# EAGLE board indicator_lights (EAGLE 7.2.0)
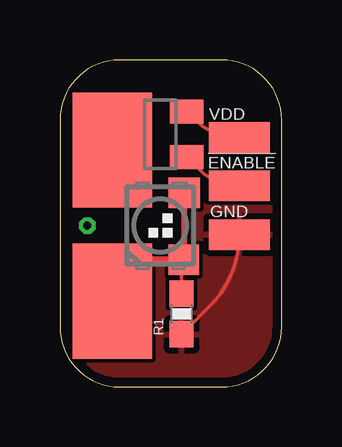
[diagram p0: board, top side]
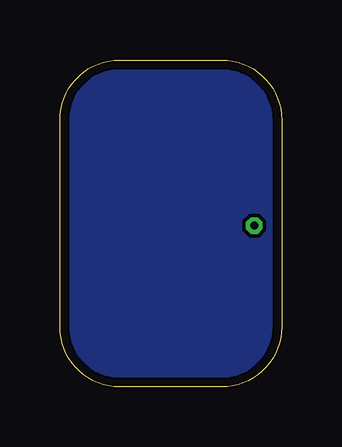
[diagram p1: board, bottom side, seen from below]

Size 9.25 x 13.64 mm. Coordinates in mm from the lower left corner, seen from the top.
Outline: 0,11.14 0,2.5 arc90 2.5,0 6.75,0 arc90 9.25,2.5 9.25,11.14 arc90 6.75,13.64 2.5,13.64 arc90 0,11.14
Copper layers (1*16): Top 0.0356mm / dielectric 1.5011mm / Bottom 0.0356mm
Design rules "oshpark-2layer": minimum track width 6mil, minimum drill 13mil, track to track 6mil, track to pad 6mil, pad to pad 6mil, via to via 6mil, smd to smd 6mil, copper to edge 15mil, drill to drill 6mil, minimum pad ring 7mil, minimum via ring 7mil, stop-mask expansion 4mil, vias tented up to drill 0mil, thermal gap 10mil

## Footprints (pad centres in the part's own frame; a part is rotated, then mirrored left to right if it is on the bottom)
SMD1,27-2,54 = smd 1.27 x 2.54: 1 0,0
P-LCC-4-3 = smd 3.3 x 4.8: 1 -2,-3.15; 2 -2,3.15 | smd 1.27 x 1.27: 3 0.984,1.372; 4 0.984,-1.423; P$1 0.991,1.372; P$2 1.016,1.372
SOT23 = smd 1 x 1.4: 1 -0.95,-1.1; 2 0.95,-1.1; 3 0,1.1
0603-RES = smd 1.1 x 1: 1 -0.85,0; 2 0.85,0

## Placement (x,y rotation side)
!ENABLE  [SMD1,27-2,54]  7.49,8.38 90 top
GND  [SMD1,27-2,54]  7.49,6.35 90 top
LED1  LS E67B  [P-LCC-4-3]  4.19,6.73 0 top
Q1  BSS84  [SOT23]  4.19,10.54 90 top
R1  36  [0603-RES]  5.08,3.05 90 top
VDD  [SMD1,27-2,54]  7.49,10.41 90 top

## Library data of the parts
!ENABLE GND VDD = wirepad
LED1 = led
Q1 = transistor-small-signal
R1 = SparkFun-Passives

## Nets
!ENABLE: !ENABLE.1 Q1.1
GND: GND.1 R1.1
N$1: LED1.2 Q1.3
N$2: LED1.1 LED1.3 LED1.4 R1.2
VDD: Q1.2 VDD.1

## Tracks (layer width: path | path; a pad name or v marks a point on that pad's centre or on a via)
!ENABLE
  Top 0.152: !ENABLE.1 arc-45 5.8,9.08 Q1.1
GND
  Top 0.152: R1.1 6.26,3.38 arc45 GND.1
  pour Top: -0.25,12.57 -0.25,3.37 arc45 1.14,0 6.56,0 arc45 9.02,1.02 arc-45 9.38,1.88 9.4,1.91 9.4,10.04 arc45 7.87,13.72 1.84,13.72 arc45 0,12.95 arc-45 -0.09,12.74
N$1
  Top 0.254: Q1.3 arc45 2.68,10.37 LED1.2
N$2
  Top 0.152: R1.2 5.08,5.08 arc-45 LED1.4
  Top 0.254: LED1.3 LED1.4 3.29,5.31 arc-45 2.92,5.46 arc45 2.19,3.7 LED1.1
  pour Bottom: 0.25,12.57 1.52,13.84 6.49,13.84 arc-45 8.64,12.95 arc45 8.82,12.52 9.52,11.81 9.52,2.71 arc-45 8.51,0.25 arc45 7.21,-0.28 7.11,-0.38 3.32,-0.38 arc-45 0.25,0.89 0.25,1.11 arc45 -0.13,2.03 -0.13,11.65 arc-45
N$3  (via drill 0.33)
  other vias: 1.14,6.73
VDD
  Top 0.152: VDD.1 7.4,10.41 arc-45 5.64,11.15 Q1.2